# Altium PCB FM_transmitter_rev1.PcbDoc
Units mm, origin at the board's own origin, x right, y up, seen from the top; angles counter-clockwise.
Board outline 85 x 85 mm, 4 copper layers (Top Layer, Int1 (GND), Int2 (PWR), Bottom Layer), stack 1.586 mm thick; 44 components, 24 nets, 133 pads, 84 vias.
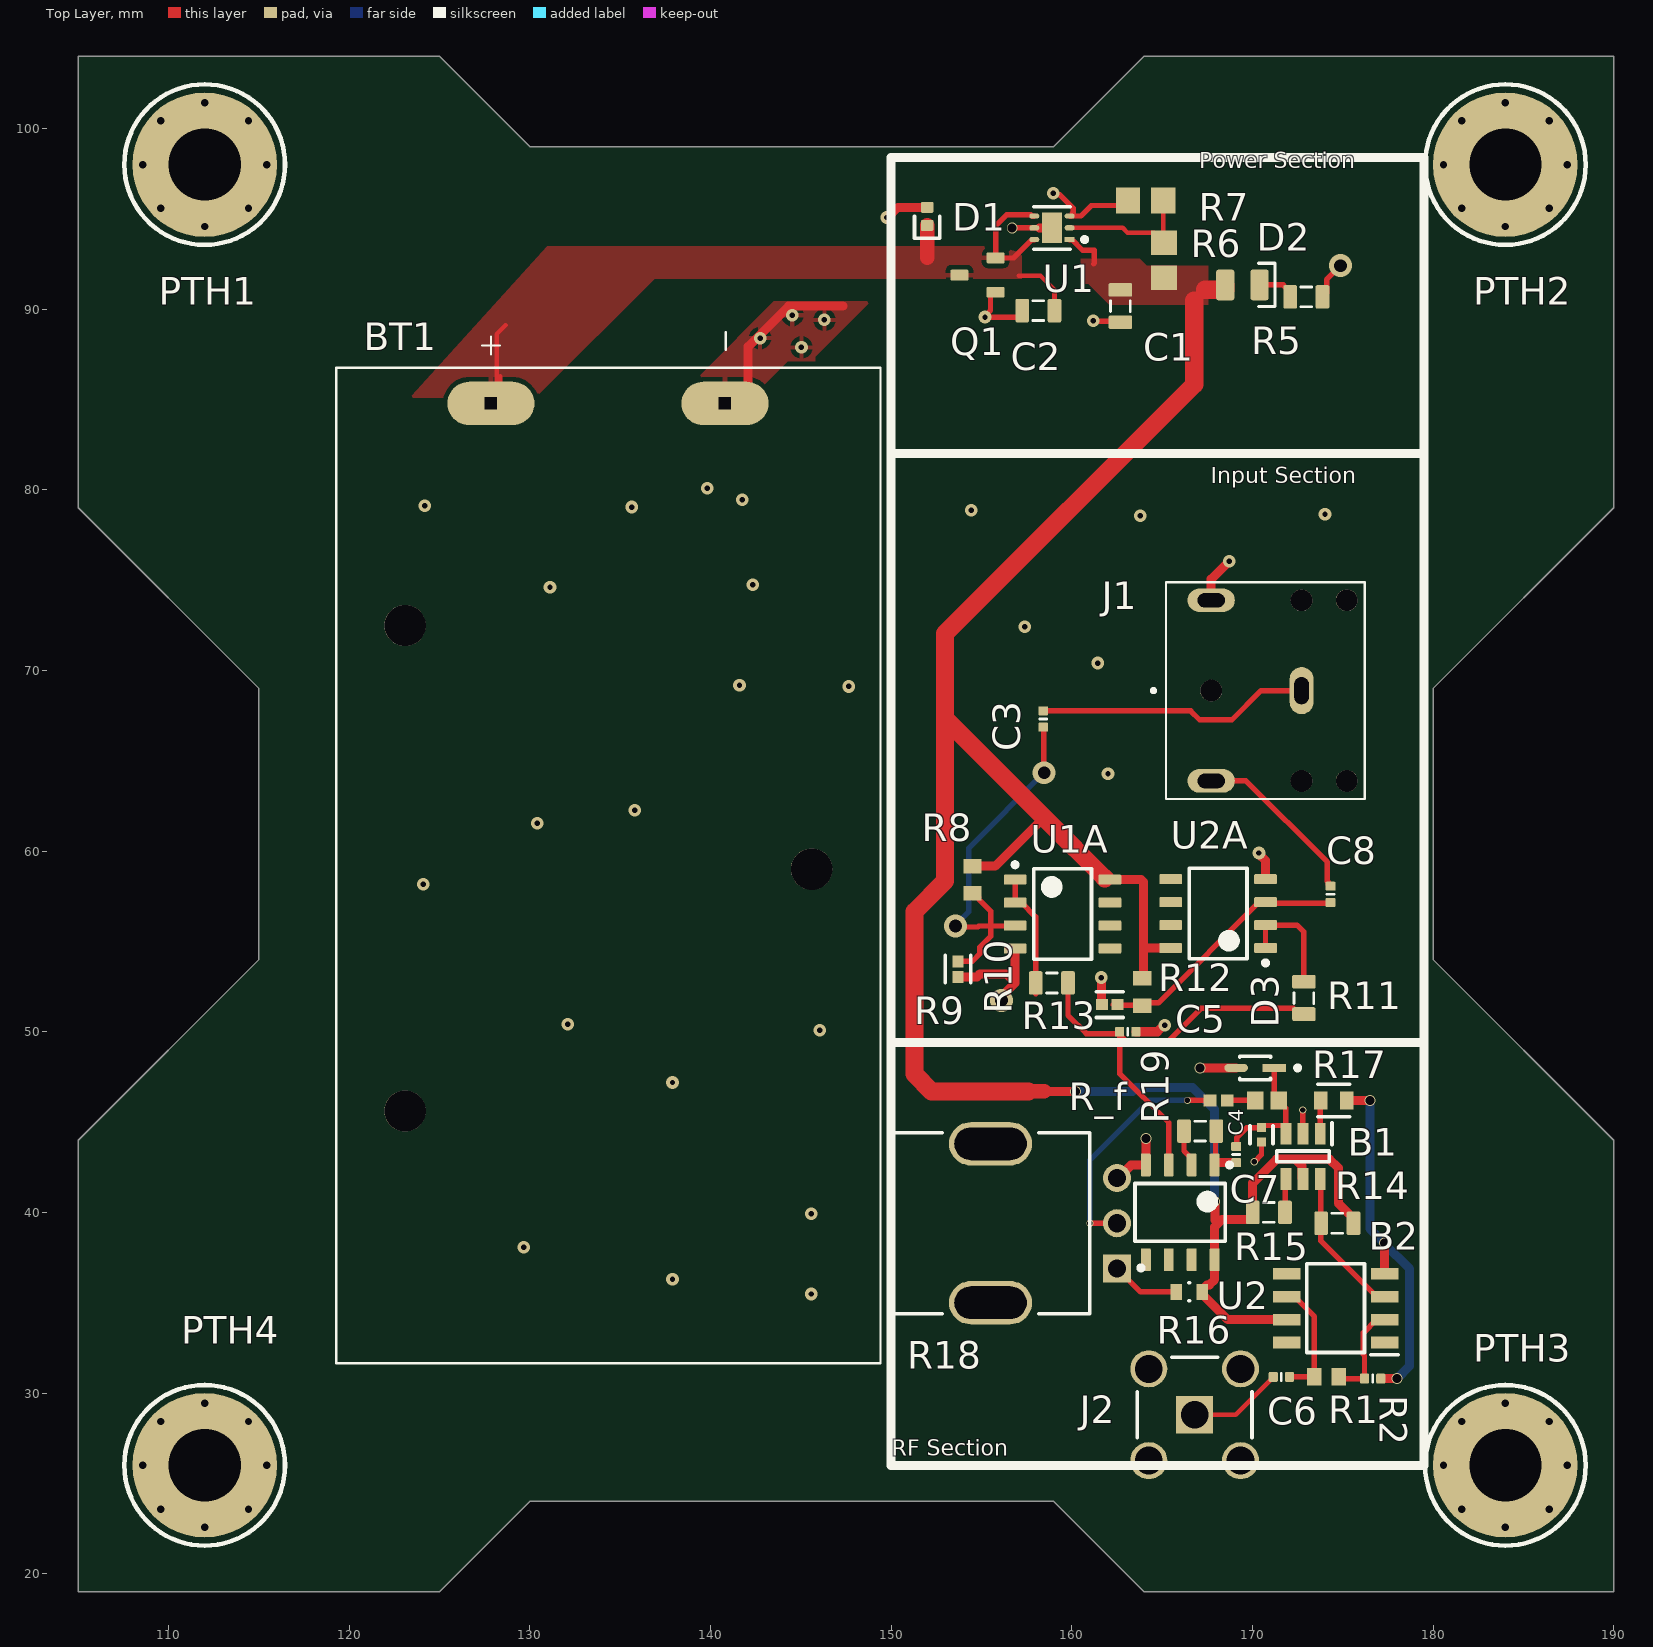
[diagram p0: Top Layer view]
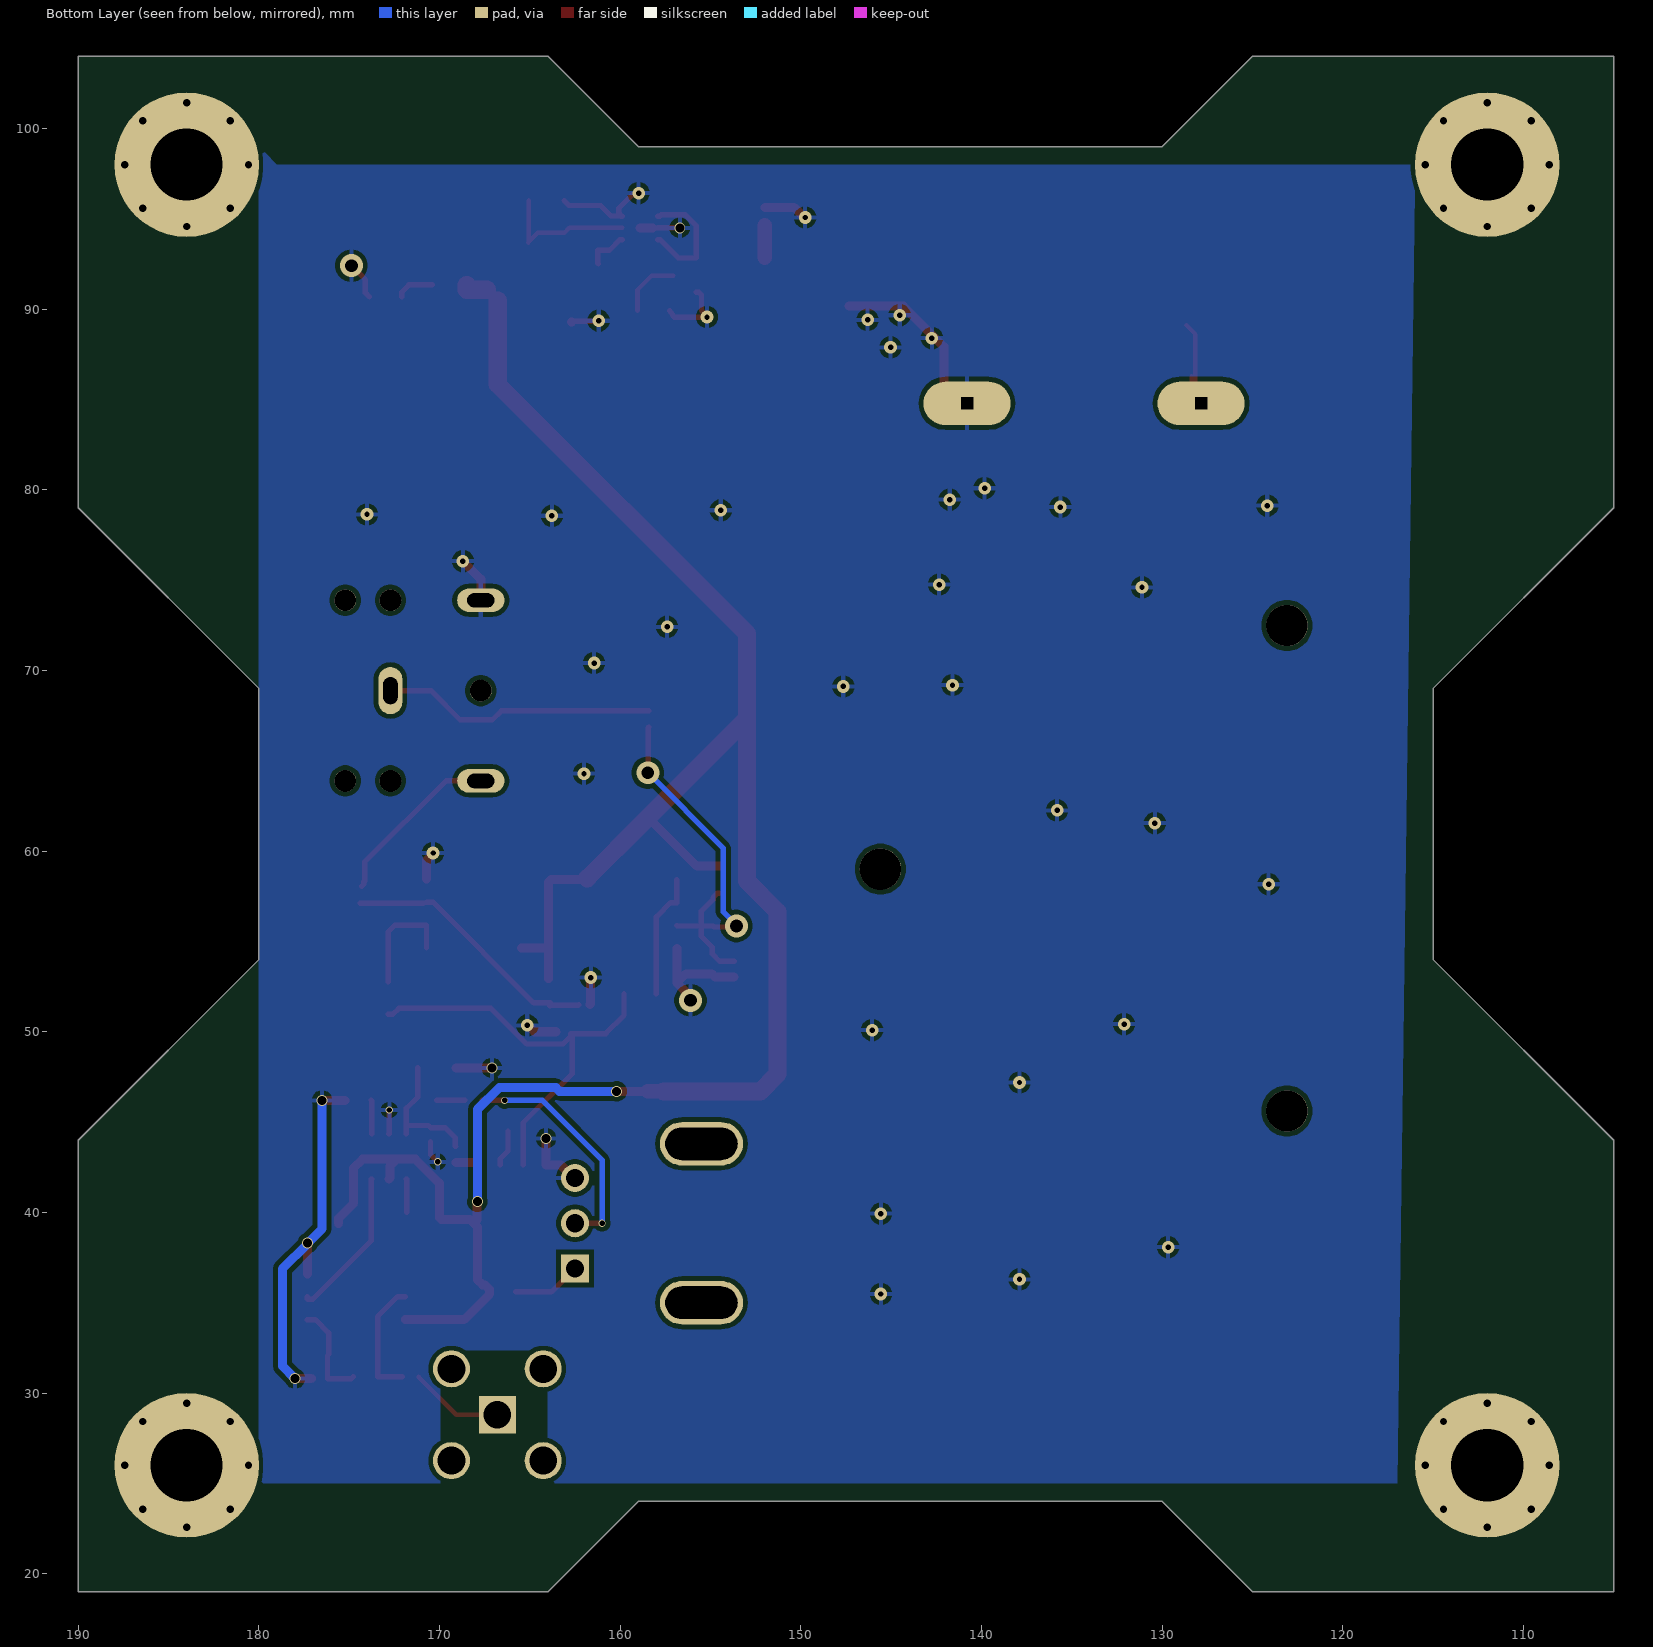
[diagram p1: Bottom Layer view, seen from below]
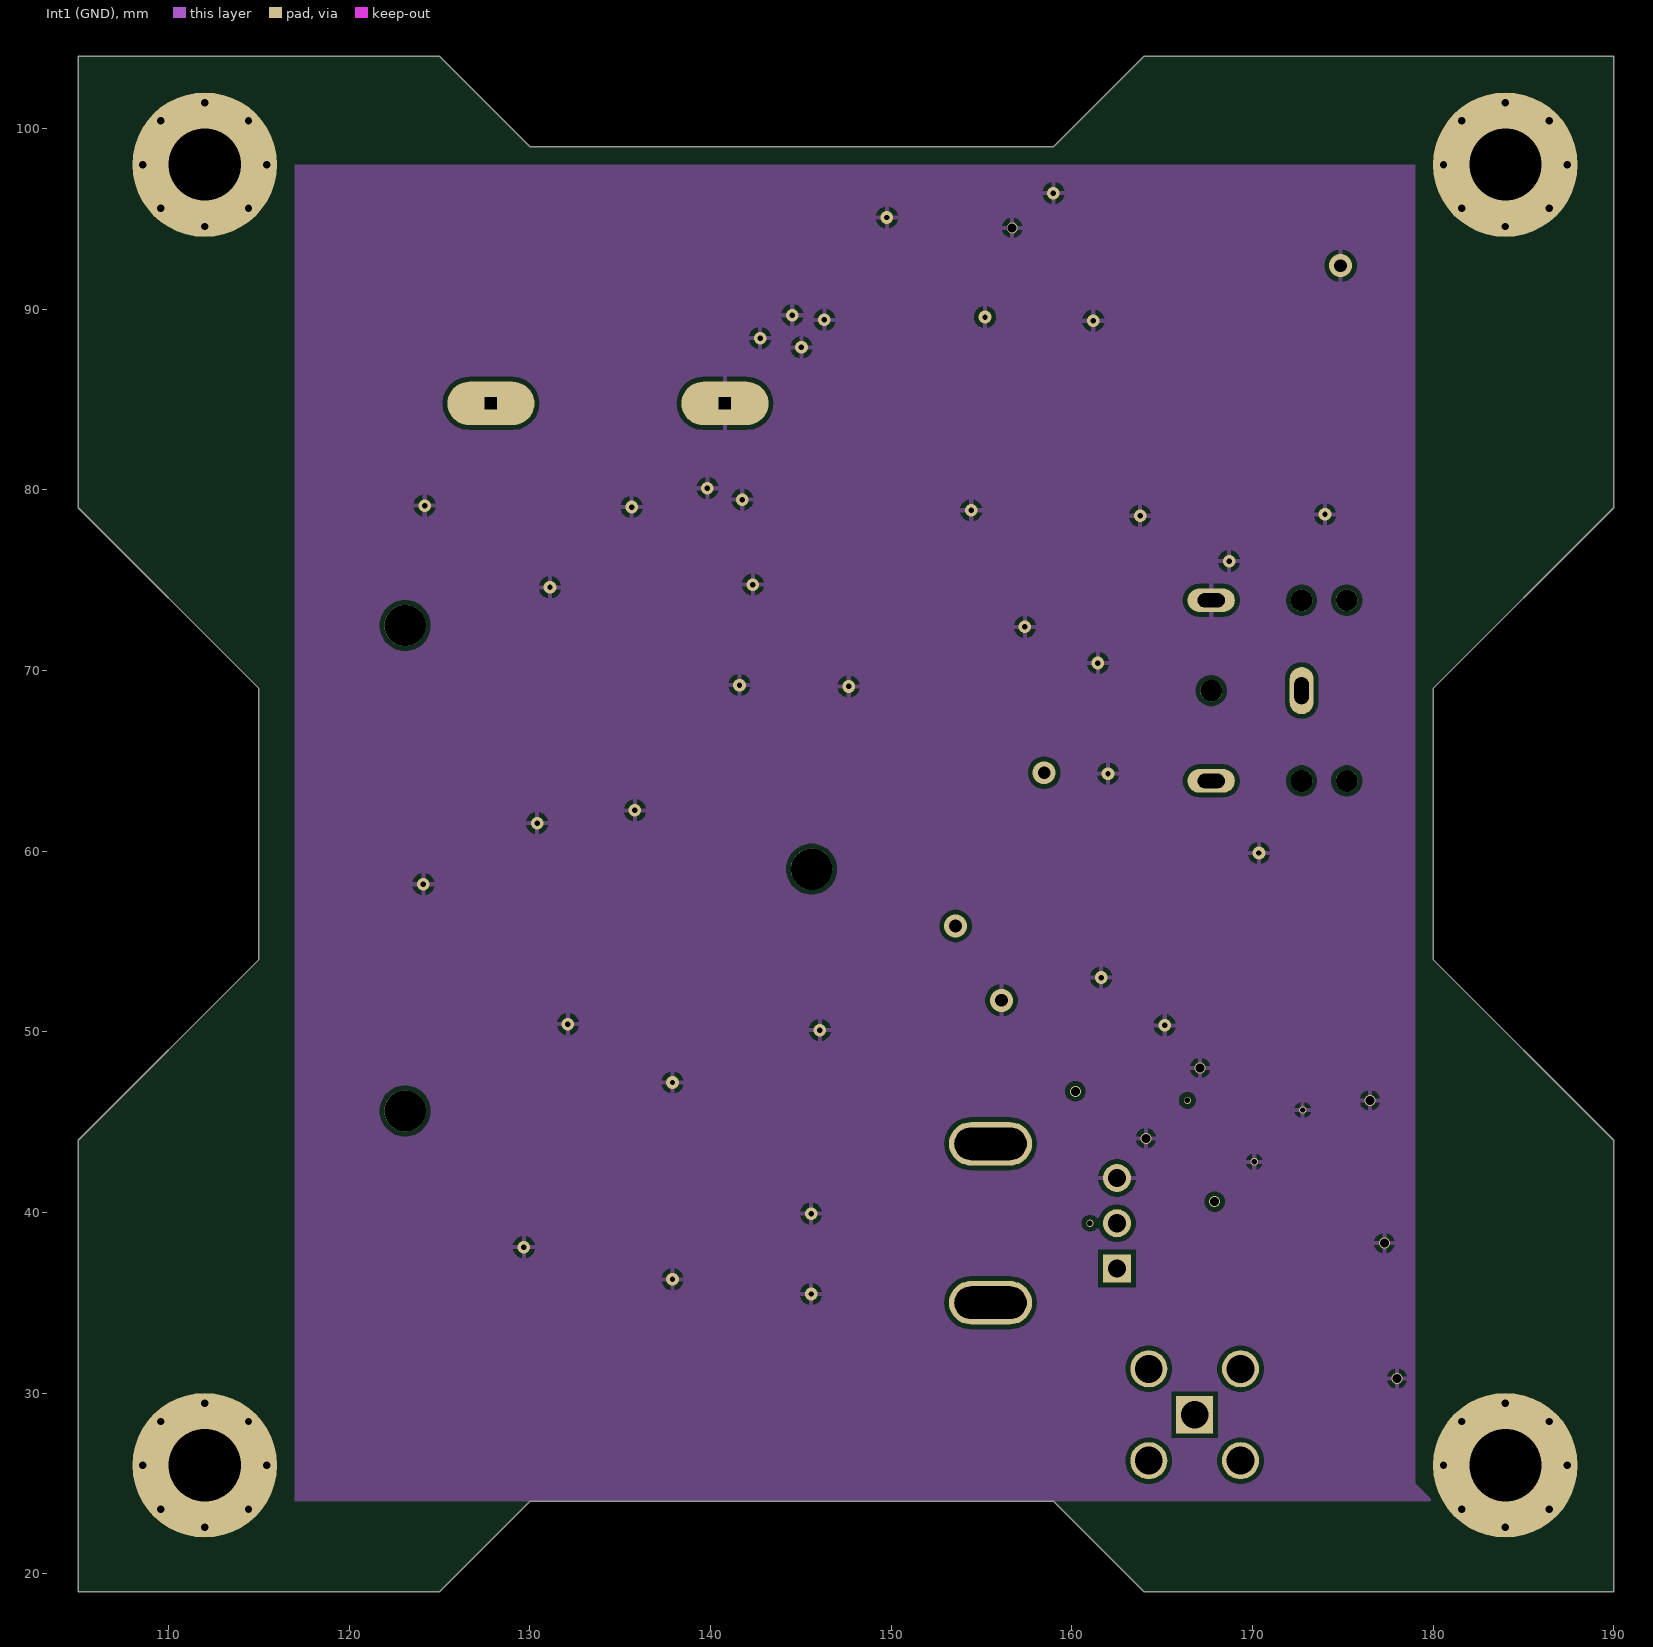
[diagram p2: Int1 (GND)]
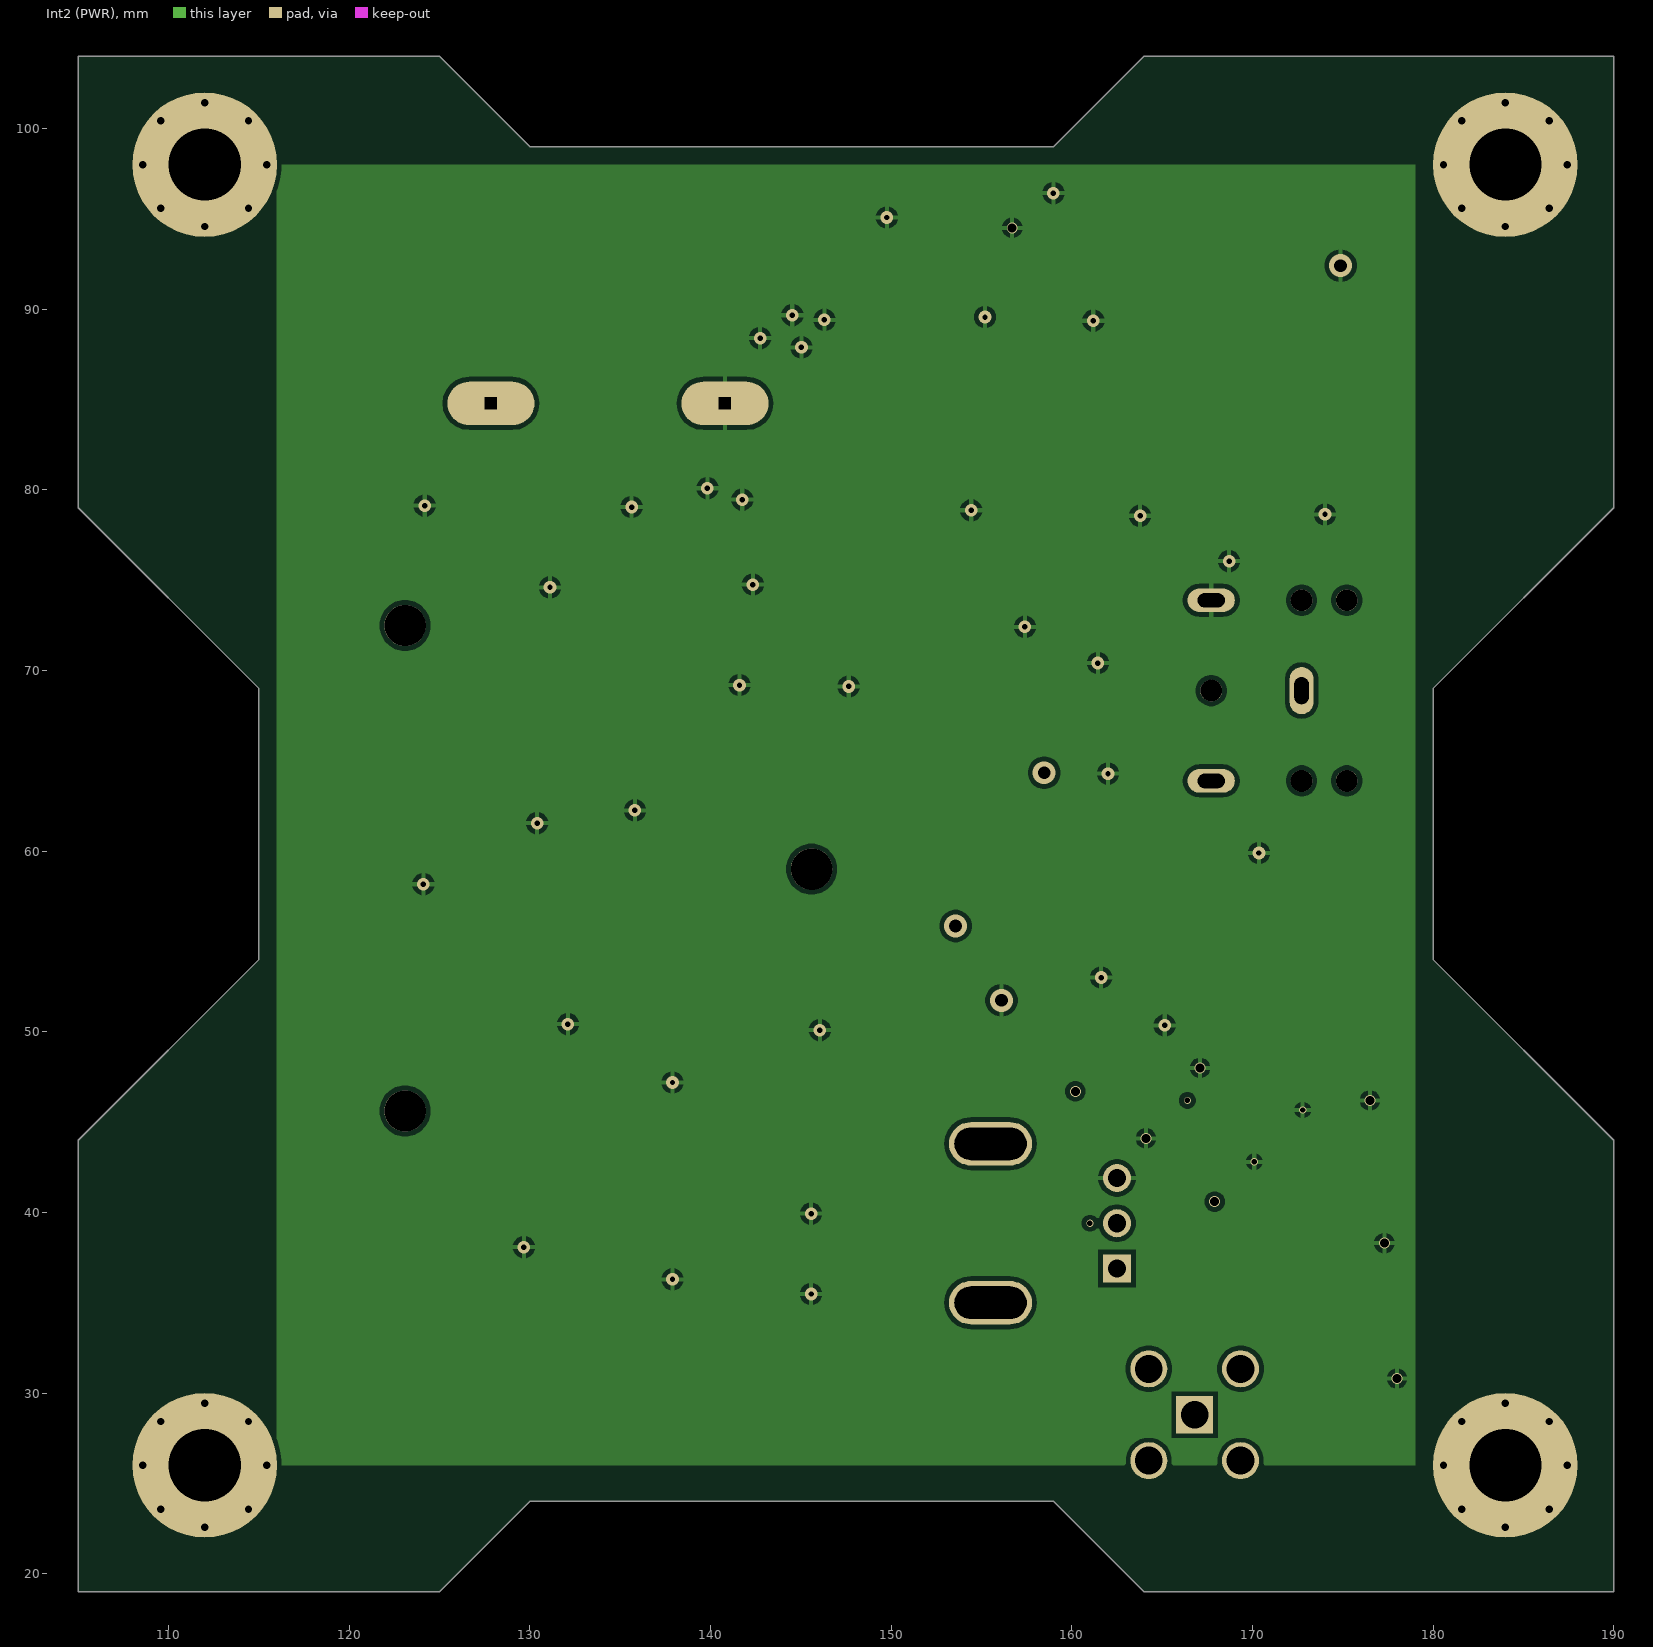
[diagram p3: Int2 (PWR)]
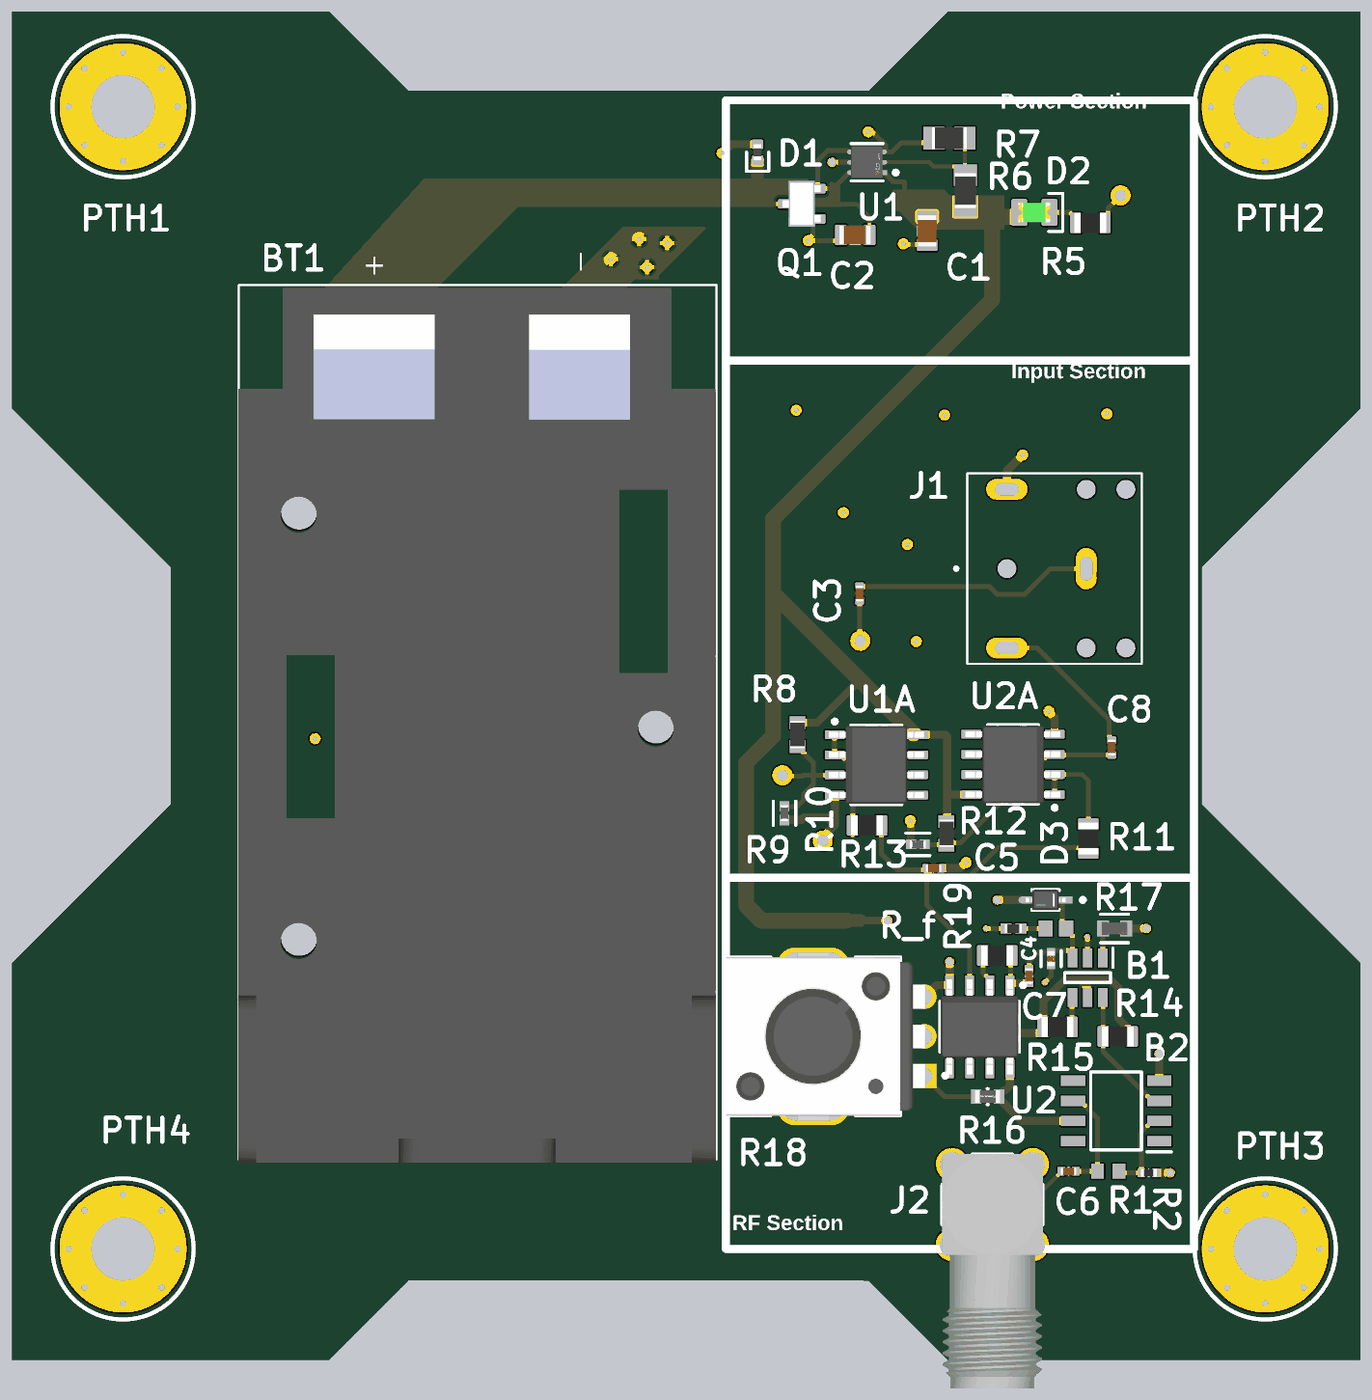
[diagram p4: 3D render of the assembled board from above, using the file's embedded part models]

## Layer stack, top to bottom
Top Solder: solder mask 0.0254, SM-001, Dk 4
Top Layer: signal copper 0.035
Dielectric 1: prepreg 0.2104, PP-017, Dk 4.4
Int1 (GND): signal copper 0.0152
Dielectric 3: core 1.065, Core-039, Dk 4.6
Int2 (PWR): signal copper 0.0152
Dielectric 4: prepreg 0.2104, PP-017, Dk 4.4
Bottom Layer: signal copper 0.035
Bottom Solder: solder mask 0.0254, SM-001, Dk 4

## Board outline
105,19 105,44 115,54 115,69 105,79 105,104 125,104 130,99 159,99 164,104 190,104 190,79 180,69 180,54 190,44 190,19 164,19 159,24 130,24 125,19

## Design rules (kind name [scope] priority, off if disabled: settings)
Clearance Clearance_1 [(ExistsOnLayer('Int1 (GND)') Or ExistsOnLayer('Int2 (PWR)')) vs (ExistsOnLayer('Int1 (GND)') Or ExistsOnLayer('Int2 (PWR)'))] p1: gap=0.254 ignorepadtopadclearanceinfootprint=FALSE sourcerule=43 cellrowname=All cellrowtype=0 cellcolname=All cellcoltype=0 innerlayers=TRUE
Clearance Clearance_2 [(ExistsOnLayer('Top Layer') Or ExistsOnLayer('Bottom Layer')) vs (ExistsOnLayer('Top Layer') Or ExistsOnLayer('Bottom Layer'))] p2: gap=0.254 ignorepadtopadclearanceinfootprint=FALSE sourcerule=43 cellrowname=All cellrowtype=0 cellcolname=All cellcoltype=0 outerlayers=TRUE
Clearance [All] p3: gap=0.254 ignorepadtopadclearanceinfootprint=FALSE ismatrix=TRUE
ComponentClearance ComponentClearance_1 [All] p1: gap=0.254 collisioncheckmode=3 verticalgap=0.254 showdistances=FALSE
ComponentClearance [All] p2: gap=0.254 collisioncheckmode=3 verticalgap=0.254 showdistances=FALSE
HoleSize MaxMinHoleSize_1 [All] p1: absolutevalues=TRUE maxlimit=6.3 minlimit=0.2 maxpercent=80.000 minpercent=20.000
HoleSize [All] p2: absolutevalues=TRUE maxlimit=2.54 minlimit=0.025 maxpercent=80.000 minpercent=20.000
HoleToHoleClearance [All] p1: gap=0.1 allowstackedmicrovias=TRUE
MinimumSolderMaskSliver [All] p1: minsoldermaskwidth=0.1
PolygonConnect PolygonConnectStyle_1 [All] p1: connectstyle=Relief reliefconductorwidth=0.254 reliefentries=2 polygonreliefangle="0 Angle" airgapwidth=0.254
PolygonConnect [All] p2: connectstyle=Relief reliefconductorwidth=0.254 reliefentries=4 polygonreliefangle="90 Angle" airgapwidth=0.254
RoutingVias [All] p1: holewidth=0.711 width=1.27 viastyle="Through Hole" minholewidth=0.711 minwidth=1.27 maxholewidth=0.711 maxwidth=1.27
SilkToSilkClearance SilkToSilkClearance_1 [All] p1: silktosilkclearance=0.254
SilkToSilkClearance [All] p2: silktosilkclearance=0.254
SilkToSolderMaskClearance SilkToSolderMaskClearance_1 [All] p1: minsilkscreentomaskgap=0 clearancetoexposedcopper=TRUE
SilkToSolderMaskClearance [IsPad] p2: minsilkscreentomaskgap=0.254 clearancetoexposedcopper=TRUE
SolderMaskExpansion SolderMaskExpansion_1 [All] p1: expansion=0.102 istentingtop=FALSE useseparateexpansions=TRUE expansionbottom=0.102 istentingbottom=FALSE
SolderMaskExpansion [All] p2: expansion=0.102 istentingtop=FALSE
UnRoutedNet [All] p1: checkbadconnections=TRUE
Width MaxMinWidth_1 [All] p1: maxlimit=2 minlimit=0.127 preferedwidth=0.3 minimp=50.000000 maximp=50.000000 favimp=50.000000
Width [All] p2: maxlimit=0.254 minlimit=0.254 preferedwidth=0.254
23 further rules are at their usual default settings.

## Components (designator, comment, footprint, x,y, rotation, side; value= is the part's Value field where it differs from the comment)
B1 "MAX2606EUT+T" SOT95P280X145-6N 172.8,43.1 r270 top
B2 "LMH6714MA_NOPB" SOIC127P600X175-8N 174.6,34.7 r180 top
BT1 "BC9VPC" BAT_BC9VPC 134.322,59 r90 top
C1 "Capacitor 100µF +/-20% 6.3V 0805" CAPC0805(2012)145_L 162.687,90.17 r270 top value=2u2
C2 "Capacitor 100µF +/-20% 6.3V 0805" CAPC0805(2012)145_L 158.141,89.916 r180 top value=2u2
C3 "Capacitor 2,2µF +/-20% 10V 0402" CAPC0402(1005)60_L 158.42,67.31 r270 top value=2.2µF
C4 "750pF" FP-C0402-BB-MFG 170.5,44.3 r270 top value="750 pF"
C5 "Capacitor 22nF +/-20% 10V 0402" CAPC0402(1005)60_L 163.1,50 r0 top value=22nF
C6 "Capacitor 2,2µF +/-20% 10V 0402" CAPC0402(1005)60_L 171.6,30.9 r180 top value=2.2µF
C7 "Capacitor 2,2µF +/-20% 10V 0402" CAPC0402(1005)60_L 169.1,43.2 r90 top value=2.2µF
C8 "Capacitor 2,2µF +/-20% 10V 0402" CAPC0402(1005)60_L 174.32,57.607 r270 top value=2.2µF
D1 "D_TVS_0402" D_0402 151.994,95.131 r270 top
D2 "GREEN" LED_0805_GREEN 169.443,91.338 r180 top
D3 "BZT52C2V4S-7-F" FP-SOD323-IPC_B 170.15,48 r180 top
J1 "SJ1-3523N" CUI_SJ1-3523N 172.716,68.885 r90 top
J2 "731000114" MOLX-731000114_V 166.8,28.8 r90 top
L1 "400nH" FP-LQW18CA_00-MFG 174.5,46.2 r0 top
PTH1 "Mounting Hole M4" "Mounting Hole M4" 112,98 r0 top
PTH2 "Mounting Hole M4" "Mounting Hole M4" 184,98 r0 top
PTH3 "Mounting Hole M4" "Mounting Hole M4" 184,26 r0 top
PTH4 "Mounting Hole M4" "Mounting Hole M4" 112,26 r0 top
Q1 "SSM3J338R,LF" SSM3J338R,LF-SOT23-F 154.778,91.882 r90 top
R1 "910R" RESC1608X55X30NL15T15 174.1,30.9 r180 top
R2 "100R2F" RESC0402(1005)_L 176.65,30.8 r180 top value=100R
R5 "1KR5J" RESC0805(2012)_L 172.974,90.678 r180 top value=1k
R6 "Resistor 1k +/-1% 0805 125 mW" RESC2013X70X40ML20T20 165.1,92.71 r270 top
R7 "Resistor 1k +/-1% 0805 125 mW" RESC2013X70X40ML20T20 164.084,96.012 r0 top value=160k
R8 "Resistor 100k +/-1% 0603 100 mW" RESC1608X55X25ML10T15 154.508,58.42 r90 top value=100k
R9 "ERA-2AEB473X" FP-ERA2A-IPC_B 153.695,53.467 r90 top value=47k
R10 "1KR5J" RESC0805(2012)_L 158.9,52.7 r0 top value=1k
R11 "1KR5J" RESC0805(2012)_L 172.847,51.867 r270 top value=1k
R12 "Resistor 100k +/-1% 0603 100 mW" RESC1608X55X25ML10T15 163.9,52.2 r90 top value=100k
R13 "ERA-2AEB473X" FP-ERA2A-IPC_B 162.1,51.5 r0 top value=47k
R14 "1KR5J" RESC0805(2012)_L 174.7,39.4 r0 top value=1k
R15 "1KR5J" RESC0805(2012)_L 170.9,40 r180 top value=1k
R16 "14.7k" FP-ERA3A-MFG 166.5,35.6 r180 top value=14.7kΩ
R17 "2.7k" RESC1608X55X30NL20T20 170.8,46.2 r0 top
R18 "PTV09A-4225F-B103" FP-PTV09A-4-MFG 155.5,39.4 r90 top
R19 "Resistor 0R 0402 63 mW" RESC1005X40X25ML05T10 168.125,46.2 r0 top value=0
R_f "1KR5J" RESC0805(2012)_L 167.1,44.5 r180 top value=1k (schematic designator R_feedback)
U1 "TLV76701DRVR" FP-DRV0006A-IPC_C 158.9,94.5 r180 top
U1A "LM358DR" D0008A_L 159.487,56.515 r0 top
U2 "LM358DR" D0008A_L 166,40 r270 top
U2A "LM358DR" D0008A_L 168.097,56.54 r180 top

## Footprints (in the part's own frame and the unit in brackets; to place one, negate y for a bottom-side part, rotate by r counter-clockwise, add the part's x,y. Pads: shape width x height; smd on the part's side, far side on the other; paste and mask are expansions set on the pad)
BAT_BC9VPC [mil]
  oval 94.88x189.76 hole 26 square: N(1015,-255) P(1015,255)
  round 90 hole 90 unplated: ""(-527,442) ""(0,-444) ""(531,442)
  silkscreen extent -1077,-594 1171,592, body extent -1085,-593 1085,593, height 845
CAPC0402(1005)60_L [mm] "Chip Capacitor, Body 1.0x0.5mm, Height 0.6mm, IPC High Density"
  rrect25% 0.5x0.55 smd: 1(-0.45,0) 2(0.45,0)
  silkscreen extent 0,-0.2 0,0.2, body extent -0.5,-0.25 0.5,0.25, height 0.6
CAPC0805(2012)145_L [mm] "Chip Capacitor, Body 2.0x1.2mm, Height 1.45mm, IPC High Density"
  rrect25% 0.76x1.3 smd: 1(-0.9,0) 2(0.89,0)
  silkscreen extent -0.3,-0.55 0.3,0.55, body extent -1,-0.6 1,0.6, height 1.45
CUI_SJ1-3523N [mm]
  oval 2.616x1.308 hole 0.8 slot 1.5 at 0 deg: 1(0,0)
  oval 1.308x2.616 hole 0.8 slot 1.5 at 90 deg: 2(5,5) 3(-5,5)
  round 1.2 hole 1.2 unplated: ""(-5,-2.5) ""(-5,0) ""(0,5) ""(5,-2.5) ""(5,0)
  silkscreen extent -6,-3.5 6,8.3
D0008A_L [mm] "SOIC, 8-Leads, Body 5x4mm, Pitch 1.27mm, IPC High Density"
  rrect18% 1.25x0.55 smd: 1(-2.625,1.905) 2(-2.625,0.635) 3(-2.625,-0.635) 4(-2.625,-1.905) 5(2.625,-1.905) 6(2.625,-0.635) 7(2.625,0.635) 8(2.625,1.905)
  silkscreen extent -2.75,-2.5 1.6,2.85, body extent -3,-2.45 3,2.45, height 1.63
D_0402 [mm]
  rrect25% 0.6x0.7 smd: A(-0.5,0) K(0.5,0)
  silkscreen extent 0,-0.7 1.2,0.7, body extent -0.5,-0.25 0.5,0.25, height 0.51
FP-C0402-BB-MFG [mm]
  rect 0.52x0.52 smd paste+0 mask+0: 1(-0.4,0) 2(0.4,0)
  silkscreen extent -0.5,-0.64 0.5,0.64, body extent -0.8,-0.4 0.8,0.4, height 0.25
FP-DRV0006A-IPC_C [mm]
  rect 0.556x0.292 smd paste+0 mask+0: 1(-0.978,0.65)
  rrect100% 0.556x0.292 smd paste+0 mask+0: 2(-0.978,0) 3(-0.978,-0.65) 4(0.978,-0.65) 5(0.978,0) 6(0.978,0.65)
  rect 1.1x1.7 smd paste-1000 mask+0: 7(0,0)
  silkscreen extent -1.93,-1.17 1,1.17, body extent -1.36,-1.1 1.36,1.1, height 0.25
FP-ERA2A-IPC_B [mm]
  rect 0.66x0.616 smd paste+0 mask+0: 1(-0.426,0) 2(0.426,0)
  silkscreen extent -0.76,-0.71 0.76,0.71, body extent -0.5,-0.25 0.5,0.25, height 0.4
FP-ERA3A-MFG [mm]
  rect 0.65x0.9 smd paste+0 mask+0: 1(-0.725,0) 2(0.725,0)
  silkscreen extent -0.03,-0.5 0.03,0.5, body extent -1.15,-0.6 1.15,0.6, height 0.25
FP-LQW18CA_00-MFG [mm]
  rect 0.75x1 smd paste+0 mask+0: 1(-0.725,0) 2(0.725,0)
  silkscreen extent -0.87,-0.9 0.87,0.9, body extent -1.2,-0.6 1.2,0.6, height 0.25
FP-PTV09A-4-MFG [mm]
  rect 1.55x1.55 hole 1 paste-2539.97 mask+0: 1(-2.5,-7)
  round 1.55 hole 1 paste-2539.97 mask+0: 2(0,-7) 3(2.5,-7)
  rrect100% 2.4x4.6 hole 4 slot 1.8 at 0 deg paste-2539.97 mask+0: 4(-4.4,0) 5(4.4,0)
  silkscreen extent -5,-8.45 5,5.5, body extent -5.8,-7.88 5.8,5.6, height 0.25
FP-SOD323-IPC_B [mm]
  rect 1.306x0.432 smd paste+0 mask+0: 1(-1.05,0)
  rrect100% 1.306x0.432 smd paste+0 mask+0: 2(1.05,0)
  silkscreen extent -2.48,-0.65 0.85,0.65, body extent -1.95,-0.9 1.95,0.9, height 0.25
LED_0805_GREEN [mm]
  rrect25% 1x1.7 smd: A(0.95,0) K(-0.95,0)
  silkscreen extent -1.8,-1.2 -0.9,1.2, body extent -1,-0.63 1,0.63, height 1.12
MOLX-731000114_V [mm] "Connector, 5-Leads, Body 14.8x6.35mm, Pitch 2.54mm"
  rect 2.05x2.05 hole 1.54: 1(0,0)
  round 2.05 hole 1.54: 2(-2.54,2.54) 3(-2.54,-2.54) 4(2.54,-2.54) 5(2.54,2.54)
  silkscreen extent -1.26,-3.17 3.17,3.17, body extent -11.62,-3.17 3.18,3.18, height 9.57
"Mounting Hole M4" [mm]
  round 8 hole 4: 3(0,0)
  silkscreen extent -4.44,-4.44 4.44,4.44
RESC0402(1005)_L [mm] "Chip Resistor, Body 1.0x0.5mm, IPC High Density"
  rrect25% 0.5x0.55 smd: 1(-0.45,0) 2(0.45,0)
  silkscreen extent 0,-0.2 0,0.2, body extent -0.5,-0.25 0.5,0.25, height 0.3
RESC0805(2012)_L [mm] "Chip Resistor, Body 2.0x1.3mm, IPC High Density"
  rrect25% 0.76x1.3 smd: 1(-0.9,0) 2(0.89,0)
  silkscreen extent -0.3,-0.55 0.3,0.55, body extent -1,-0.62 1,0.63, height 0.6
RESC1005X40X25ML05T10 [mm] "Chip Resistor, 2-Leads, Body 1.05x0.55mm, IPC Low Density"
  rect 0.7x0.65 smd: 1(-0.475,0) 2(0.475,0)
  body extent -0.53,-0.28 0.53,0.28, height 0.4
RESC1608X55X25ML10T15 [mm] "Chip Resistor, 2-Leads, Body 1.70x0.90mm, IPC Low Density"
  rect 0.8x1 smd: 1(-0.75,0) 2(0.75,0)
  body extent -0.85,-0.45 0.85,0.45, height 0.55
RESC1608X55X30NL15T15 [mm] "Chip Resistor, 2-Leads, Body 1.60x0.80mm, IPC Medium Density"
  rect 0.8x0.95 smd: 1(-0.675,0) 2(0.675,0)
  body extent -0.87,-0.48 0.87,0.48, height 0.55
RESC1608X55X30NL20T20 [mm] "Chip Resistor, 2-Leads, Body 1.60x0.80mm, IPC Medium Density"
  rect 0.9x1 smd: 1(-0.65,0) 2(0.65,0)
  body extent -0.9,-0.5 0.9,0.5, height 0.55
RESC2013X70X40ML20T20 [mm] "Chip Resistor, 2-Leads, Body 2.2x1.35mm, IPC Low Density"
  rect 1.35x1.45 smd: 1(-0.975,0) 2(0.975,0)
  body extent -1.1,-0.67 1.1,0.67, height 0.7
SOIC127P600X175-8N [mm]
  rect 1.528x0.65 smd: 1(-2.711,1.905) 2(-2.711,0.635) 3(-2.711,-0.635) 4(-2.711,-1.905) 5(2.711,-1.905) 6(2.711,-0.635) 7(2.711,0.635) 8(2.711,1.905)
  silkscreen extent -3.47,-2.45 1.6,2.58
SOT95P280X145-6N [mm]
  rect 1.2x0.6 smd: 1(-1.25,0.95) 2(-1.25,0) 3(-1.25,-0.95) 4(1.25,-0.95) 5(1.25,0) 6(1.25,0.95)
  silkscreen extent -1.85,-1.45 0.3,1.6
SSM3J338R,LF-SOT23-F [mm]
  rrect25% 0.6x1 smd: D(0,1) G(-0.95,-1) S(0.95,-1)
  body extent -1.45,-1.2 1.45,1.2, height 0.91

## Part data
B1: "VCO Oscillators 45MHz to 650MHz, Integrated IF VCOs with Differential Output", Manufacturer_Name="Analog Devices", Mouser Part Number=700-MAX2606EUTT, Datasheet Link=https://www.mouser.co.uk/datasheet/2/256/MAX2605-MAX2609-1515582.pdf, Geometry.Height=1.45mm, Manufacturer_Part_Number=MAX2606EUT+T, Mouser Price/Stock=https://www.mouser.co.uk/ProductDetail/Analog-Devices-Maxim-Integrated/MAX2606EUT%2bT?qs=GxOUx7aO6nxQrK5ySdDhWg%3D%3D
B2: "Video op amp,LMH6714MA 250MHz  SO8", Manufacturer_Name="Texas Instruments", Manufacturer_Part_Number=LMH6714MA/NOPB, Mouser Part Number=926-LMH6714MA/NOPB, Datasheet Link=http://www.ti.com/lit/ds/symlink/lmh6714.pdf, Geometry.Height=1.75mm, Mouser Price/Stock=https://www.mouser.co.uk/ProductDetail/Texas-Instruments/LMH6714MA-NOPB?qs=7lkVKPoqpbabNRERuC1FjQ%3D%3D
BT1: library part CMP-00029-00001-1, "Battery Holder 1 Cells 9V Size Plastic Tray", Case/Package=None, Check_prices=https://www.snapeda.com/parts/BC9VPC/Memory+Protection+Devices/view-part/?ref=eda, Component Type=Standard, Design Item ID=BC9VPC, MF="MPD (Memory Protection Devices)", MP=BC9VPC, Pins=2, SnapEDA_Link=https://www.snapeda.com/parts/BC9VPC/Memory+Protection+Devices/view-part/?ref=snap, Source=BC9VPC.SchLib
C1 C2: library part CMP-001-00054-4, "Chip Capacitor, 100µF +/-20%, 6.3V, 0805, Thickness 1.45 mm", Case/Package=0805, Max Operating Temperature=85°C, Min Operating Temperature=-55°C, Tolerance=10%, Voltage Rating=6.3V, Mounting Technology=SMT, Pins=2
C3 C6 C7 C8: library part CMP-001-00056-4, "Chip Capacitor, 2,2µF +/-20%, 10V, 0402, Thickness 0.6 mm", Case/Package=0402, Max Operating Temperature=85°C, Min Operating Temperature=-55°C, Tolerance=10%, Voltage Rating=10V, Mounting Technology=SMT, Pins=2
C4: library part CMP-1034-01571-3, "CAP CER 750PF 50V NP0 0402", Capacitance="750 pF", Manufacturer=Kemet, Manufacturer Part Number=C0402C751J5GACTU, Package=C0402-BB, Temperature="-55°C to +125°C", Temperature Characteristic=C0G, Temperature Coefficient=15%, Temperature Range High=+125°C, Temperature Range Low=-55°C, Tolerance=0.05, Voltage Rating="50 V", Automotive=No, Category=Cap, ComponentLink2Description=Datasheet, ComponentLink2URL=https://content.kemet.com/datasheets/KEM_C1002_X7R_SMD.pdf, Device Class L1="Passive Components", Device Class L2=Capacitors, Device Class L3="Ceramic Capacitors", Digikey Description="CAP CER 750PF 50V NP0 0402", Height=0.55mm, Ipc Land Pattern Name=CAPC10050X50, Lead Free=Yes, Material=Ceramic, Mouser Description="Multilayer Ceramic Capacitor, C Series, 750 Pf, - 5%, C0g / Np0, 50 V, 0402 [1005 Metric] Rohs Compliant: Yes", Octopart=https://octopart.com/c0402c751j5gactu-kemet-19049839, RoHS=TRUE
C5: library part CMP-001-00062-3, "Chip Capacitor, 22nF +/-20%, 10V, 0402, Thickness 0.6 mm", Case/Package=0402, Max Operating Temperature=85°C, Min Operating Temperature=-55°C, Tolerance=10%, Voltage Rating=10V, Mounting Technology=SMT, Pins=2
D1: "Diode TVS / ESD 0402"
D2: library part LED_0805_GREEN, "LED 0805 GREEN SMD"
D3: library part CMP-12792-000028-1, "DIODE ZENER 2.4V 200MW SOD323", Max Operating Temperature=150°C, Max Power Dissipation=200mW, Max Reverse Leakage Current=50uA, Min Operating Temperature=-65°C, Output Current=50mA, Package Quantity=3000, Test Current=5mA, Tolerance=8%, Voltage Rating (DC)=2.4V, Contact Plating=Tin, Element Configuration=Single, ESD Protection=No, Height=1mm, Impedance=100R, Lead Free="Lead Free", Length=1.8mm, Mount="Surface Mount", Number of Pins=2, Packaging="Tape and Reel", Peak Reverse Current=50uA, Power Dissipation=200mW, Power Rating=200mW, Radiation Hardening=No, REACH SVHC="No SVHC", Termination=SMD/SMT, Voltage Tolerance=8%, Weight=0.000173oz, Width=1.4mm, Zener Current=5mA, Zener Voltage=2.4V
J1: library part CMP-002-00094-1, "3.5 mm, Stereo, Right Angle, Through Hole, 3 Conductors, 0 Internal Switches, Audio Jack Connector", Case/Package=None, Check_prices=https://www.snapeda.com/parts/SJ1-3523N/CUI+Devices/view-part/?ref=eda, Component Type=Standard, CUI_purchase_URL=https://www.cuidevices.com/product/interconnect/connectors/audio-connectors/jacks/sj1-3523n?utm_source=snapeda.com&utm_medium=referral&utm_campaign=snapedaBOM, Design Item ID=SJ1-3523N, MF="CUI Devices", MP=SJ1-3523N, Pins=3, SnapEDA_Link=https://www.snapeda.com/parts/SJ1-3523N/CUI+Devices/view-part/?ref=snap, Source=SJ1-3523N.SchLib
J2: library part CMP-2000-05487-1, "SMA Right-Angle PCB Jack Receptacle, Brass Body, Gold Plated, 50 Ohm, 5-Pin THD, RoHS, Tray", Manufacturer=Molex, Package Description="5-Pin Through Hole Device, Body 14.8 x 6.35 mm, Pitch 2.54 mm", Datasheet URL=http://www.molex.com/webdocs/datasheets/pdf/en-us/0731000114_RF_COAX_CONNECTORS.pdf, Datasheet Version=09/2016, Manufacturer URL=http://www.molex.com/, Mounting Technology=ThroughHole, Package Reference=731000114, Package URL=http://www.molex.com/pdm_docs/sd/731000114_sd.pdf
L1: library part CMP-06042-011085-1, "Wire Wound Ferrite type RF Inductor 400nH ±5% 680mA 0.26Ω 0603 (1608)"
PTH1 PTH2 PTH3 PTH4: library part CMP-00004-1, "M4 size screw hole"
Q1: "MOSFET P-Channel Vds=12V Id=6A", Manufacturer Part Number=Toshiba, Manufacturer=SSM3J338R,LF
R1: library part CMP-2000-00683-1, Manufacturer=Panasonic, Part Number=ERJ-3EKF9100V
R2: library part CMP-009-00065-2, "100R 0.063W 1% 0402 (1005 Metric)  SMD", Case/Package=0402, Power=63mW, Tolerance=1%, Mounting Technology=SMT, Pins=2
R5 R10 R11 R14 R15 R_f: library part CMP-009-00076-2, "1K 0.125W 5% 0805 (2012 Metric)  SMD", Case/Package=0805, Power=125mW, Tolerance=5%, Mounting Technology=SMT, Pins=2
R6 R7: library part CMP-009-00010-5, "Chip Resistor, 1 KOhm, +/- 1%, 0.125 W, -55 to 155 degC, 0805 (2013 Metric)", Case/Package=0805, Max Operating Temperature=155°C, Min Operating Temperature=-55°C, Power=125mW, Tolerance=1%, Voltage Rating=150V, Mounting Technology=SM, Pins=2, RoHS Compliant=True
  R6: 840K=835k
R8 R12: library part CMP-009-00023-5, "Chip Resistor, 100 KOhm, +/- 1%, 0.1 W, -55 to 155 degC, 0603 (1608 Metric)", Case/Package=0603, Max Operating Temperature=155°C, Min Operating Temperature=-55°C, Power=100mW, Tolerance=1%, Voltage Rating=50V, Mounting Technology=SM, Pins=2, RoHS Compliant=True
R9 R13: library part CMP-009-00193-1, "Fixed Resistor, Thin Film, 0.063W, 47000ohm, 50V, 0.1% +/-Tol, 25ppm/Cel, Surface Mount, 0402", Case/Package=0402, Max Operating Temperature=155°C, Min Operating Temperature=-55°C, Power=63mW, Tolerance=0.1%, Mounting Technology="Surface Mount", Pins=2, RoHS Compliant=Yes
R16: library part CMP-2000-00913-2, "RES SMD 14.7KOHM 0.1% 1/10W 0603", Manufacturer="Panasonic Electronic Components", Manufacturer Part Number=ERA-3AEB1472V, Package=ERA3A, Power Rating=0.1W, Resistance=14.7kΩ, Temperature="-55°C to +155°C", Temperature Coefficient=25ppm/°C, Temperature Range High=+155°C, Temperature Range Low=-55°C, Tolerance=0.1%, Voltage Rating=75V, Automotive=Yes, Automotive Grade="Grade 0", Category=Res, ComponentLink2Description=Datasheet, ComponentLink2URL=https://industrial.panasonic.com/cdbs/www-data/pdf/RDM0000/AOA0000C307.pdf, Composition="Metal Film", Device Class L1="Passive Components", Device Class L2=Resistors, Device Class L3="Chip SMD Resistors", Digikey Description="RES SMD 14.7KOHM 0.1% 1/10W 0603", Footprint Url=https://industrial.panasonic.com/cdbs/www-data/pdf/RDM0000/DMM0000COL17.pdf, Height=0.55mm, Lead Free=Yes, Mouser Description="Res Thin Film 1.6 x 0.8 mm 14.7K Ohm 0.1% 0.1W(1/10W) 25ppm/ C Molded SMD Punched Carrier T/R", Octopart=https://octopart.com/era3aeb1472v-panasonic-42876006, RoHS=TRUE, Series=ERA
R17: library part CMP-2000-00012-1, Manufacturer=Panasonic, Part Number=ERA3AEB272V
R18: library part CMP-07234-000052-1, "POT 10K OHM 1/20W CARBON LINEAR", Max Operating Temperature=50°C, Max Power Dissipation=50mW, Min Operating Temperature=-10°C, Package Quantity=100, Resistance=10kR, Resistance Tolerance=20%, Resistor Type=Carbon, Actuator Diameter=0.236inch, Actuator Length=0.984inch, Depth=12.5mm, Height=12.5mm, Hole Diameter=9.1mm, Length=11.4mm, Military Standard=Not, Mount="Through Hole", Number of Gangs=1, Number of Turns=1, Packaging=Bulk, Power Rating=50mW, Radiation Hardening=No, REACH SVHC="No SVHC", RoHS Compliant=Yes, Series="Pro Audio PTV09", Taper=Linear, Technology="CARBON FILM", Termination=PCB, Tolerance=20%, TYPE=Potentiometer
R19: library part CMP-009-00004-5, "Chip Resistor, 0 Ohm, 0.063 W, -55 to 155 degC, 0402 (1005 Metric)", Case/Package=0402, Max Operating Temperature=155°C, Min Operating Temperature=-55°C, Power=63mW, Voltage Rating=50V, Mounting Technology=SM, Pins=2, RoHS Compliant=True
U1: library part CMP-04917-000172-1, "IC REG LINEAR POS ADJ 1A 6WSON"
U1A U2 U2A: library part CMP-014-00024-2, "Dual Operational Amplifier, 3 to 32 V, 0 to 70 degC, 8-Pin SOIC (D), Green (RoHS & no Sb/Br), Tape and Reel", Case/Package=SOIC, Manufacturer="Texas Instruments (TI)", Max Dual Supply Voltage=16V, Max Operating Temperature=70°C, Min Dual Supply Voltage=1.5V, Min Operating Temperature=0°C, Nominal Dual Supply Voltage=12V, Nominal Supply Current=1.2mA, Nominal Voltage Gain=100dB, Output Current=30mA, Package Description="8-Pin Small Outline Integrated Circuit, Body 4.9 x 3.9 mm, Pitch 1.27 mm", Package Quantity=1, Package Reference=D0008A, Package Version="4040047-3/M, 06/2011", Channels=2, Common Mode Rejection Ratio=65dB, Datasheet URL=http://www.ti.com/lit/ds/symlink/lm358.pdf, Datasheet Version="SLOS068T, 04/2015", Manufacturer URL=http://www.ti.com/, Max Supply Voltage=16V, Min Supply Voltage=1.5V, Mounting Technology=SM, Nominal Gain Bandwith Product=700KHz, Nominal Supply Voltage=12V, Package URL=http://www.ti.com/lit/ml/msoi002j/msoi002j.pdf, Packaging=CutTape, Pins=8, RoHS Compliant=True, Slew Rate=0.3V/us, Unity Gain Bandwidth Product=700KHz

## Via types
v1: diameter 0.7, hole 0.3, Top Layer to Bottom Layer, 36 vias
v2: diameter 0.762, hole 0.406, Top Layer to Bottom Layer, 32 vias
v3: diameter 0.6, hole 0.5, Top Layer to Bottom Layer, 8 vias
v4: diameter 0.4, hole 0.3, Top Layer to Bottom Layer, 4 vias
v5: diameter 1.27, hole 0.711, Top Layer to Bottom Layer, 4 vias

## Nets (pads, with @x,y where several pads share a name; then routed paths per layer and width w, separated by ;. In a path a pad name is that pad's centre, name@x,y a point inside that pad or via, vN(x,y) a via of type N, cw(c..) or ccw(c..) an arc to the next point about the centre after c; other vN are vias at no path point)
+5: B1.5 B2.7 C1.1 D2.A R6.2 R8.2 R12.2 R14.2 R15.2 R16.1 U1.1 U1A.8 U2.8 U2A.8 | length 127.1
  Top Layer w0.3: U1.1 160.002,93.85 160.593,93.259 161.253,93.259 161.253,92.553 161.2,92.5
  Top Layer w0.5: R8.2 155.758,59.17 158.272,61.684 158.636,61.684 ; 158.466,46.7 v3(160.2,46.7) ; U1A.8 163.83,58.42 163.957,58.293 R12.2@163.957,52.95 ; 164.033,54.635 U2A.8 ; v3(167.9,40.6) 167.919,40.581 167.919,39.586 168.103,39.402 ; B2.7 168.635,34.065 167.225,35.475 R16.1 167.225,35.725 167.487,35.987 167.612,35.987 167.905,36.28 U2.8 167.905,39.205 168.103,39.402 ; B1.5 172.75,41.9 172.75,42.563 172.359,42.954 ; R14.2 175.59,39.67 174.753,40.507 174.753,42.46 174.259,42.954 172.359,42.954 ; 168.103,39.402 168.3,39.6 169.88,39.6 170.01,39.73 R15.2 170.01,41.623 171.341,42.954 172.359,42.954
  Top Layer w0.8: 157.6,46.7 158.466,46.7
  Top Layer w1: 157.6,46.7 152.233,46.7 151.282,47.65 151.282,56.642 152.984,58.344 152.984,67.335 ; U1A.8@161.824,58.495 158.636,61.684 152.984,67.335 ; 166.776,90.486 166.776,85.827 152.984,72.034 152.984,67.335 ; 167.362,91.072 168.493,91.072 D2.A
  Bottom Layer w0.5: v3(160.2,46.7) 163.357,46.7 163.561,46.904 166.692,46.904 167.9,45.696 v3(167.9,40.6)
+9: BT1.P C2.1 D1.K Q1.D Q1.S U1.4 U1.6 | length 18.2
  Top Layer w0.254: 128.372,86.284 128.372,85.039 128.168,84.836 128.168,88.621 128.651,89.103 ; 151.892,92.735 151.994,92.837 ; D1.K D1.K@152.044,94.631 ; 157.074,91.846 158.267,91.846 159.041,91.072 C2.1
  Top Layer w0.3: U1.6 157.798,93.85 156.78,92.832 Q1.S 155.778,94.605 156.406,95.232 157.716,95.232 157.798,95.15 U1.4
  Top Layer w0.8: 151.994,92.837 D1.K
"bias + lsig": C3.2 R8.1 R9.2 U1A.3 | length 21.9
  Top Layer w0.3: v5(153.568,55.855) 153.624,55.799 154.803,55.799 154.859,55.855 155.507,55.855 ; R9.2 154.488,53.893 154.915,54.319 154.915,54.686 155.507,55.279 155.507,55.855 ; R8.1 154.608,57.67 154.858,57.42 154.858,57.32 155.507,56.671 155.507,55.855 ; U1A.3 156.836,55.855 155.507,55.855 ; C3.2 158.445,66.835 158.445,64.364 v5(158.471,64.338)
  Bottom Layer w0.3: v5(153.568,55.855) 153.568,55.916 154.305,56.652 154.305,60.173 v5(158.471,64.338)
"bias + rsig": C8.2 R12.1 R13.2 U2A.3 | length 14.3
  Top Layer w0.3: R13.2@162.3,51.5 162.325,51.475 163.875,51.475 R12.1 ; R12.1@163.872,51.6 164.797,51.6 170.372,57.175 U2A.3 ; U2A.3@170.9,57.125 C8.2@174.386,57.125
feedback: R6.1 R7.2 U1.2 | length 7.8
  Top Layer w0.254: U1.2 162.818,94.5 163.085,94.233 164.552,94.233 R6.1@165.059,93.726 ; R7.2 R6.1@165.059,93.726 ; R6.1 R6.1@165.059,93.726
GND: B1.2 B2.4 BT1.N C1.2 C2.2 C4.2 C5.2 D1.A D3.2 J1.2 L1.2 Q1.G R2.1 R5.1 R7.1 R9.1 R13.1 R18.3 U1.3 U1.5 U1.7 U1A.4 U2.4 U2A.4 | length 69.7
  Top Layer w0.3: Q1.G 155.649,90.932 155.499,90.782 155.499,89.936 155.194,89.631 v1(155.194,89.56) 157.021,89.56 C2.2 ; v3(156.7,94.5) U1.5 ; v1(158.979,96.418) 159.055,96.342 159.33,96.342 160.076,95.596 160.076,95.348 160.01,95.282 160.01,95.218 159.942,95.15 U1.3 ; U1.3@160.006,95.154 160.5,95.154 161.08,95.734 162.831,95.734 R7.1 ; v1(161.188,89.357) 161.227,89.319 162.648,89.319 C1.2 ; v4(170.1,42.8) 170.5,43.2 C4.2 ; v4(172.778,45.669) 172.789,45.658 172.789,44.361 B1.2 ; R5.1 174.104,90.908 174.104,91.63 v5(174.879,92.405)
  Top Layer w0.5: BT1.N@141.122,84.836 141.195,84.836 142.077,85.718 142.077,87.925 144.323,90.17 147.32,90.17 ; v1(149.758,95.072) 149.813,95.072 150.371,95.631 D1.A ; R9.1 154.757,53.041 154.915,53.199 156.364,53.199 156.862,52.701 ; v5(156.108,51.74) 156.108,51.948 156.862,52.701 ; U1A.4 156.862,52.701 ; 158.2,94.5 U1.7 ; v1(161.626,53) 161.65,52.976 161.65,51.524 R13.1 ; R18.3 162.553,41.9 163.278,42.625 U2.4 164.098,42.627 164.098,44.098 v3(164.1,44.1) ; C5.2 164.734,50 165.09,50.356 v1(165.144,50.356) ; v3(167.1,48) D3.2 ; J1.2 167.716,75.057 v1(168.707,76.048) ; v1(170.358,59.893) 170.358,59.839 170.722,59.475 U2A.4 ; L1.2 v3(176.5,46.2) ; R2.1 v3(178,30.8) ; v3(177.3,38.3) 177.311,38.289 B2.4
  Bottom Layer w0.5: v3(176.5,46.2) 176.5,39.1 v3(177.3,38.3) 177.3,38.273 178.7,36.873 178.7,31.5 v3(178,30.8)
  other v1: 145.567,35.484 137.897,36.297 129.667,38.075 145.567,39.929 137.897,47.193 146.05,50.089 132.105,50.419 124.104,58.166 130.404,61.544 135.814,62.255 162.001,64.287 147.65,69.113 141.605,69.19 161.442,70.409 157.404,72.415 131.115,74.6 142.342,74.752 163.779,78.562 174.015,78.638 154.432,78.867 135.636,79.045 124.181,79.121 141.757,79.451 139.827,80.086 145.034,87.884 142.748,88.392 146.304,89.408 144.526,89.662
led_K: D2.K R5.2 | length 2.1
  Top Layer w0.3: D2.K 171.694,91.338 172.084,90.948 R5.2
left_in: C3.1 J1.1 | length 15.2
  Top Layer w0.3: C3.1 166.58,67.76 167.081,67.259 168.853,67.259 170.479,68.885 J1.1
NetB1_4: B1.4 R15.1 | length 1.9
  Top Layer w0.3: R15.1 171.825,40.025 171.825,41.825 B1.4
NetB1_6: B1.6 B2.3 R14.1 | length 8.4
  Top Layer w0.3: B1.6 173.775,41.825 173.775,40 173.775,38.432 177.007,35.2 177.3,35.2 177.311,35.211 B2.3
NetB2_2: B2.2 R1.1 R2.2 | length 5.5
  Top Layer w0.3: R1.1 174.875,30.8 R2.2 176.2,32.078 176.143,32.135 176.143,33.336 176.872,34.065 B2.2
NetB2_6: B2.6 C6.1 R1.2 | length 6.7
  Top Layer w0.3: B2.6 172.328,35.335 173.425,34.238 R1.2 C6.1
NetC5_1: C5.1 R10.2 R11.2 U2.3 | length 24.2
  Top Layer w0.3: R10.2@159.79,52.1 159.79,50.91 160.8,49.9 162.725,49.9 162.75,49.875 162.75,49.74 163.169,49.321 165.175,49.321 167.154,51.3 172.254,51.3 172.577,50.977 R11.2 ; C5.1@162.65,49.8 162.65,47.682 165.365,44.967 U2.3
NetC6_2: C6.2 J2.1 | length 5.2
  Top Layer w0.27: J2.1 169.075,28.8 171.15,30.875 C6.2
NetC7_1: C7.1 R_f.1 U2.1 | length 3
  Top Layer w0.3: U2.1@167.953,42.673 167.953,44.452 R_f.1
  Top Layer w0.5: U2.1@167.953,42.673 168.03,42.75 C7.1
NetR10_1: R10.1 U1A.1 U1A.2 | length 7
  Top Layer w0.3: U1A.1 U1A.2 157.212,57.15 158,56.362 R10.1@158,52.1
NetR11_1: R11.1 U2A.1 U2A.2 | length 6.3
  Top Layer w0.3: U2A.1 U2A.2 172.466,55.905 172.847,55.524 R11.1
NetR16_2: R16.2 R18.1 | length 3.8
  Top Layer w0.3: R18.1 163.8,35.6 R16.2
NetR17_1: R17.1 R19.2 | length 1.5
  Top Layer w0.3: R19.2 R17.1
NetR18_2: R18.2 R19.1 | length 13
  Top Layer w0.3: v4(161,39.4) R18.2 ; v4(166.4,46.2) R19.1
  Bottom Layer w0.3: v4(161,39.4) 161,42.9 164.3,46.2 v4(166.4,46.2)
NetR_feedback_2: R_f.2 U2.2 | length 2.1
  Top Layer w0.3: R_f.2 166.21,43.4 166.635,42.975 U2.2
osc_inductor: B1.1 L1.1 | length 1.9
  Top Layer w0.3: B1.1 173.762,44.362 173.762,46.187 L1.1
right_in: C8.1 J1.3 | length 9.7
  Top Layer w0.3: J1.3 169.643,63.885 174.142,59.385 174.142,58.333 174.195,58.28 174.195,58.157 174.295,58.057 C8.1
tune_in: B1.3 C4.1 C7.2 D3.1 R17.2 | length 7.2
  Top Layer w0.3: C7.2 169.125,43.65 169.125,44.125 169.69,44.69 170.49,44.69 C4.1 170.61,44.81 B1.3@171.637,44.81 ; D3.1 171.2,46.4 171.841,45.759 B1.3@171.841,44.359
pads on no net: B2.1 B2.5 B2.8 BT1. J1. J2.2 J2.3 J2.4 J2.5 PTH1.3 PTH2.3 PTH3.3 PTH4.3 R18.4 R18.5 U1A.5 U1A.6 U1A.7 U2.5 U2.6 U2.7 U2A.5 U2A.6 U2A.7
copper on no net:
  other v2: 112,22.571 184,22.571 109.575,23.575 114.425,23.575 181.575,23.575 186.425,23.575 108.571,26 115.429,26 180.571,26 187.429,26 109.575,28.425 114.425,28.425 181.575,28.425 186.425,28.425 112,29.429 184,29.429 112,94.571 184,94.571 109.575,95.575 114.425,95.575 181.575,95.575 186.425,95.575 108.571,98 115.429,98 180.571,98 187.429,98 109.575,100.425 114.425,100.425 181.575,100.425 186.425,100.425 112,101.429 184,101.429

## Polygon pours and split planes (outlines as drawn)
+5 on Top Layer "+5_L01_P005" (solid, pour order 5): 161.493,92.786 163.754,92.786 164.135,92.405 167.564,92.405 167.564,90.246 162.077,90.246 160.909,91.415 160.503,91.415 160.503,92.786 160.909,92.786
+9 on Top Layer "+9_L01_P003" (solid, pour order 3): 123.352,85.09 130.302,85.09 136.906,91.694 157.226,91.694 157.226,93.091 155.956,93.472 130.972,93.472
GND on Top Layer "GND_L01_P021" (solid, pour order 21): 139.192,84.074 139.446,83.82 143.002,83.82 143.002,85.852 144.272,87.122 145.796,87.122 145.796,87.376 148.844,90.424 143.51,90.424 138.938,85.852 138.938,84.074
GND on Int1 (GND) "GND_L02_P024" (solid, pour order 24): 117,98 117,24 180,24 179,25 179,98
GND on Int1 (GND) "GND_L02_P022" (solid, pour order 22): 117,98 117,24 180,24 179,25 179,98
GND on Bottom Layer "GND_L04_P023" (solid, pour order 23): 164,25 164,31.838 163.475,32.363 169.637,32.363 170,32 169.97,31.97 169.97,25 180,25 180,99 179,98 116,98 117,25
GND on Int2 (PWR) "GND_L03_P025" (solid, pour order 25): 116,26 116,98 179,98 179,26

## Silkscreen, mask and mechanical layers (free items; w line width, h text height)
Top Overlay:
  lines w0.254: 150,49.4 179.5,49.4 150,49.4
  lines w0.5: 150,49.4 179.5,49.4 ; 150,49.4 150,26 179.5,26 179.5,49.4 ; 150,49.4 179.5,49.4 ; 150,49.4 150,82 ; 150,82 179.5,82 ; 150,82 179.5,82 ; 150,82 150,98.4 179.5,98.4 179.5,82 ; 179.5,49.4 179.5,82
  text "Power Section" at 167.056,97.5 h1.52
  text "Input Section" at 167.688,80.051 h1.52
  text "RF Section" at 150.033,26.22 h1.52
Mechanical 1:
  the board outline again, w0.3

## Text inside footprints (layer, text, board x,y; h text height)
D2: Mechanical 13 "+" at 167.677,90.338 h1 r180
J1: Mechanical 13 "PCB EDGE" at 175.966,75.885 h0.81 r90